# EAGLE board logic (EAGLE 6.4)
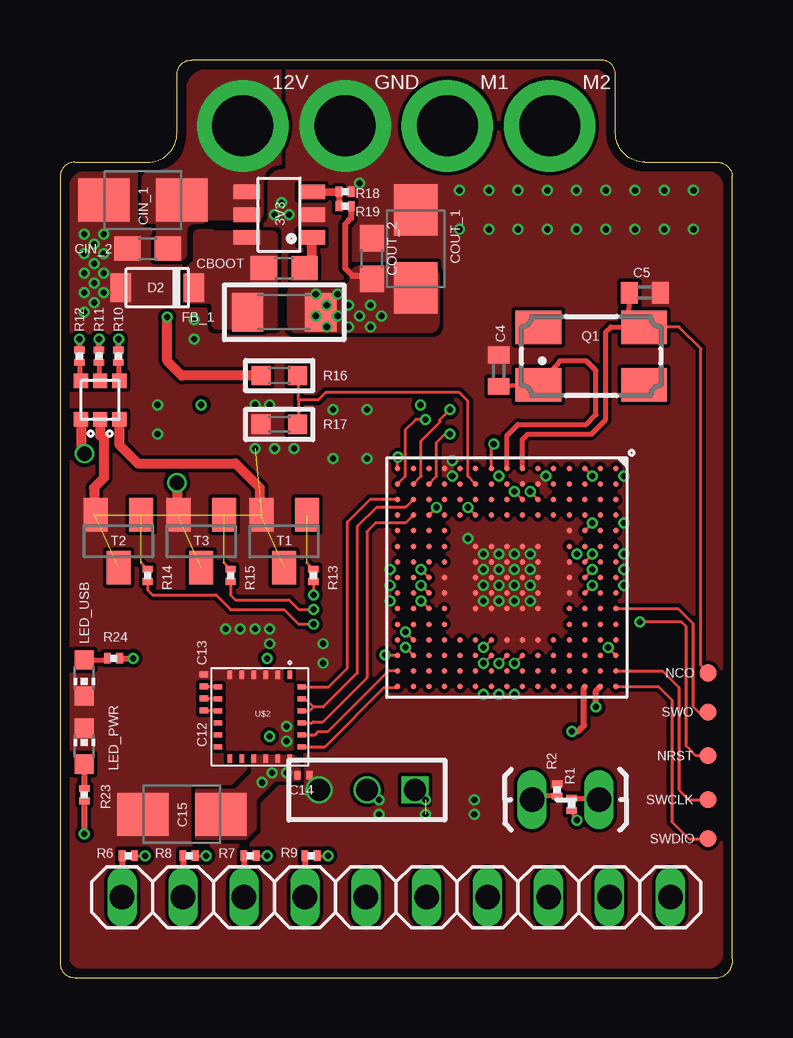
[diagram p0: board, top side]
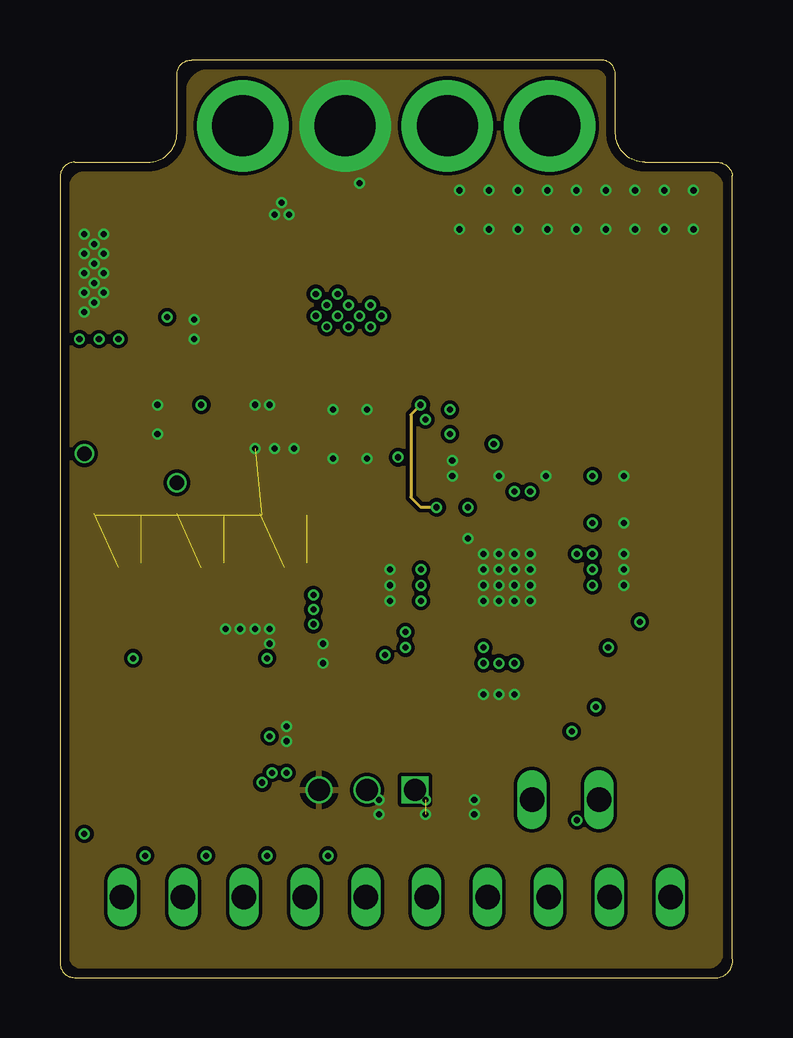
[diagram p1: board, inner layer Route2]
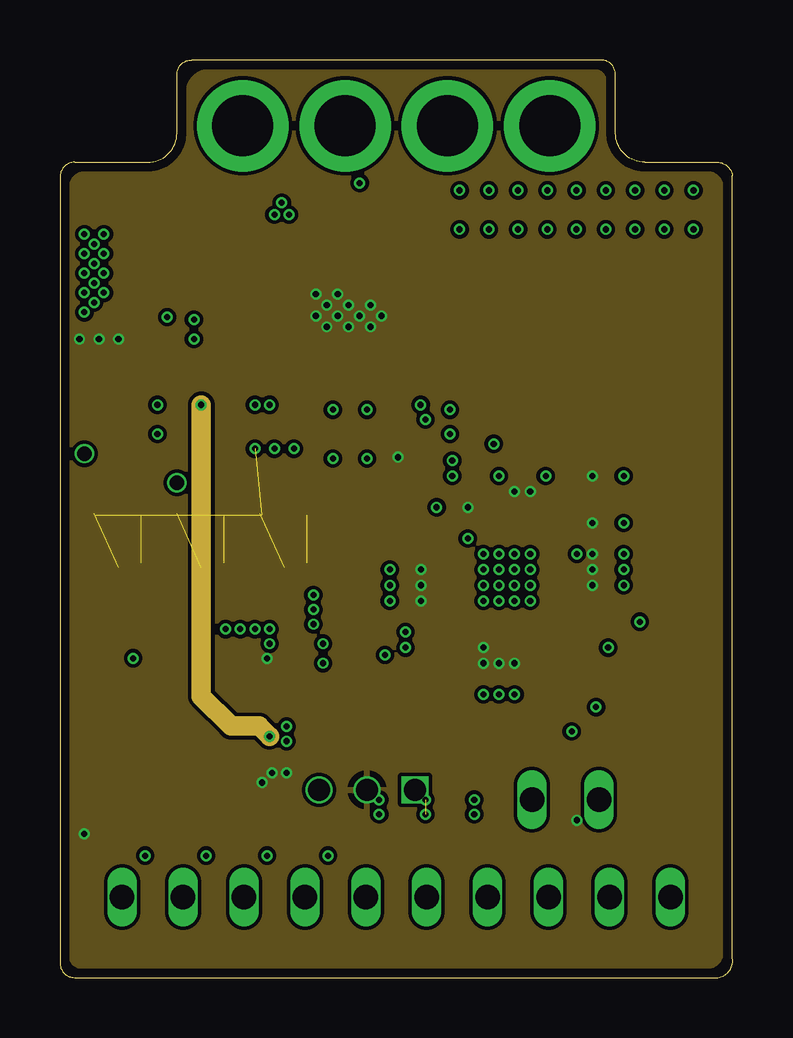
[diagram p2: board, inner layer Route3]
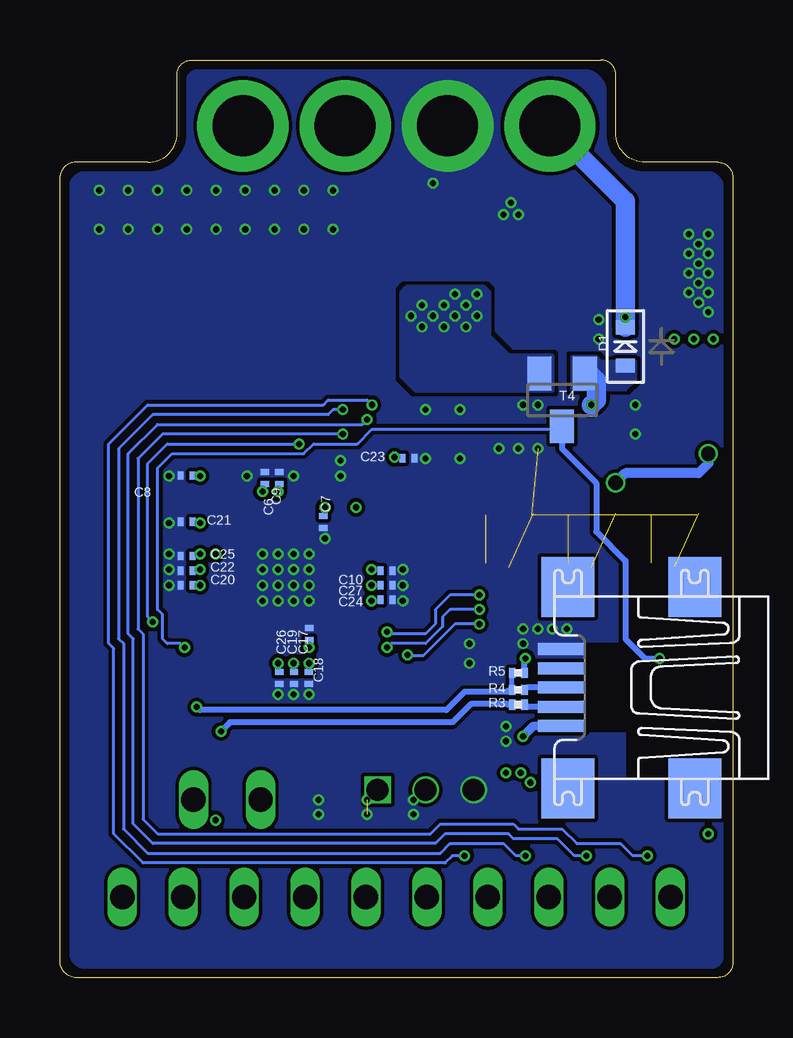
[diagram p3: board, bottom side, seen from below]

Size 28.05 x 38.25 mm. Coordinates in mm from the lower left corner, seen from the top.
Outline: 0.61,0 27.43,0 arc90 28.04,0.81 28.04,33.43 arc90 27.28,33.99 24.38,33.99 arc-90 23.17,35.2 23.17,37.64 arc90 22.56,38.25 5.49,38.25 arc90 4.88,37.64 4.88,35.2 arc-90 3.66,33.99 0.61,33.99 arc90 0,33.38 0,0.61 arc90 0.61,0
Copper layers (1*2*3*16): Top 0.035559375mm / dielectric 0.17018125mm / Route2 0.01778125mm / dielectric 47mil / Route3 0.01778125mm / dielectric 0.17018125mm / Bottom 0.035559375mm
Design rules "LaenPCBOrder *": minimum track width 5mil, minimum drill 10mil, track to track 6mil, track to pad 6mil, pad to pad 6mil, via to via 6mil, smd to smd 6mil, copper to edge 15mil, drill to drill 6mil, minimum pad ring 4mil, minimum via ring 4mil, stop-mask expansion 4mil, vias tented up to drill 13mil, thermal gap 10mil

## Footprints (pad centres in the part's own frame; a part is rotated, then mirrored left to right if it is on the bottom)
R-PDSO-G6 = smd 0.6 x 1.1: 1 -0.95,-1.35; 2 0,-1.35; 3 0.95,-1.35; 4 0.95,1.35; 5 0,1.35; 6 -0.95,1.35
C0402 = smd 0.7 x 0.9: 1 -0.65,0; 2 0.65,0
C0201 = smd 0.25 x 0.35: 1 -0.25,0; 2 0.25,0
B/3528-21W = smd 2.15 x 1.8: + 1.625,0; - -1.625,0
C0603 = smd 1.1 x 1: 1 -0.85,0; 2 0.85,0
SOD-523 = smd 0.8 x 0.6: A 0,-0.8; K 0,0.8
SC-109B = smd 1.2 x 0.85: 1 0,-1.525; 2 0,1.525
L1206 = smd 1.3 x 1.6: 1 -1.524,0; 2 1.524,0
1X02_LOCK_LONGPADS = drill 1.016 long: 1 -0.127,0; 2 2.667,0
1X03M = drill 0.914 square: 1 -2,0 | drill 0.914: 2 0,0; 3 2,0
1X10 = drill 1.016 long: 1 -11.43,0; 2 -8.89,0; 3 -6.35,0; 4 -3.81,0; 5 -1.27,0; 6 1.27,0; 7 3.81,0; 8 6.35,0; 9 8.89,0; 10 11.43,0
RGBLED = smd 0.6 x 0.6: AB 0.8,0.8; AG 0.8,-0.8; AR 0.8,0; CB -0.8,0.8; CG -0.8,-0.8; CR -0.8,0
CHIP-LED0603 = smd 0.8 x 0.8: A 0,-0.75; C 0,0.75
TP07R = smd 0.7 x 0.7: TP 0,0
CTS406 = smd 1.9 x 1.4: 1 -2.2,-1.2; 2 2.2,-1.2; 3 2.2,1.2; 4 -2.2,1.2
R0201 = smd 0.28 x 0.43: 1 -0.255,0; 2 0.255,0
R0603 = smd 0.8 x 0.8: 1 -0.762,0; 2 0.762,0
SOT23-BEC = smd 1 x 1.4: B -0.95,-1.1; C 0,1.1; E 0.95,-1.1
R-PDSO-G14 = smd 0.3 x 1.55: 1 -1.95,-2.3; 2 -1.3,-2.3; 3 -0.65,-2.3; 4 0,-2.3; 5 0.65,-2.3; 6 1.3,-2.3; 7 1.95,-2.3; 8 1.95,2.3; 9 1.3,2.3; 10 0.65,2.3; 11 0,2.3; 12 -0.65,2.3; 13 -1.3,2.3; 14 -1.95,2.3
LGA-24 = smd 0.2 x 0.35: 1 -1.25,-1.75; 2 -0.75,-1.75; 3 -0.25,-1.75; 4 0.25,-1.75; 5 0.75,-1.75; 6 1.25,-1.75; 13 1.25,1.75; 14 0.75,1.75; 15 0.25,1.75; 16 -0.25,1.75; 17 -0.75,1.75; 18 -1.25,1.75 | smd 0.35 x 0.2: 7 1.75,-1.25; 8 1.75,-0.75; 9 1.75,-0.25; 10 1.75,0.25; 11 1.75,0.75; 12 1.75,1.25; 19 -1.75,1.25; 20 -1.75,0.75; 21 -1.75,0.25; 22 -1.75,-0.25; 23 -1.75,-0.75; 24 -1.75,-1.25
UFBGA176+25 = smd 0.23 x 0.23: A1 -4.55,4.55; A2 -3.9,4.55; A3 -3.25,4.55; A4 -2.6,4.55; A5 -1.95,4.55; A6 -1.3,4.55; A7 -0.65,4.55; A8 0,4.55; A9 0.65,4.55; A10 1.3,4.55; A11 1.95,4.55; A12 2.6,4.55; A13 3.25,4.55; A14 3.9,4.55; A15 4.55,4.55; B1 -4.55,3.9; B2 -3.9,3.9; B3 -3.25,3.9; B4 -2.6,3.9; B5 -1.95,3.9; B6 -1.3,3.9; B7 -0.65,3.9; B8 0,3.9; B9 0.65,3.9; B10 1.3,3.9; B11 1.95,3.9; B12 2.6,3.9; B13 3.25,3.9; B14 3.9,3.9; B15 4.55,3.9; C1 -4.55,3.25; C2 -3.9,3.25; C3 -3.25,3.25; C4 -2.6,3.25; C5 -1.95,3.25; C6 -1.3,3.25; C7 -0.65,3.25; C8 0,3.25; C9 0.65,3.25; C10 1.3,3.25; C11 1.95,3.25; C12 2.6,3.25; C13 3.25,3.25; C14 3.9,3.25; C15 4.55,3.25; D1 -4.55,2.6; D2 -3.9,2.6; D3 -3.25,2.6; D4 -2.6,2.6; D5 -1.95,2.6; D6 -1.3,2.6; D7 -0.65,2.6; D8 0,2.6; D9 0.65,2.6; D10 1.3,2.6; D11 1.95,2.6; D12 2.6,2.6; D13 3.25,2.6; D14 3.9,2.6; D15 4.55,2.6; E1 -4.55,1.95; E2 -3.9,1.95; E3 -3.25,1.95; E4 -2.6,1.95; E12 2.6,1.95; E13 3.25,1.95; E14 3.9,1.95; E15 4.55,1.95; F1 -4.55,1.3; F2 -3.9,1.3; F3 -3.25,1.3; F4 -2.6,1.3; F6 -1.3,1.3; F7 -0.65,1.3; F8 0,1.3; F9 0.65,1.3; F10 1.3,1.3; F12 2.6,1.3; F13 3.25,1.3; F14 3.9,1.3; F15 4.55,1.3; G1 -4.55,0.65; G2 -3.9,0.65; G3 -3.25,0.65; G4 -2.6,0.65; G6 -1.3,0.65; G7 -0.65,0.65; G8 0,0.65; G9 0.65,0.65; G10 1.3,0.65; G12 2.6,0.65; G13 3.25,0.65; G14 3.9,0.65; G15 4.55,0.65; H1 -4.55,0; H2 -3.9,0; H3 -3.25,0; H4 -2.6,0; H6 -1.3,0; H7 -0.65,0; H8 0,0; H9 0.65,0; H10 1.3,0; H12 2.6,0; H13 3.25,0; H14 3.9,0; H15 4.55,0; J1 -4.55,-0.65; J2 -3.9,-0.65; J3 -3.25,-0.65; J4 -2.6,-0.65; J6 -1.3,-0.65; J7 -0.65,-0.65; J8 0,-0.65; J9 0.65,-0.65; J10 1.3,-0.65; J12 2.6,-0.65; J13 3.25,-0.65; J14 3.9,-0.65; J15 4.55,-0.65; K1 -4.55,-1.3; K2 -3.9,-1.3; K3 -3.25,-1.3; K4 -2.6,-1.3; K6 -1.3,-1.3; K7 -0.65,-1.3; K8 0,-1.3; K9 0.65,-1.3; K10 1.3,-1.3; K12 2.6,-1.3; K13 3.25,-1.3; K14 3.9,-1.3; K15 4.55,-1.3; L1 -4.55,-1.95; L2 -3.9,-1.95; L3 -3.25,-1.95; L4 -2.6,-1.95; L12 2.6,-1.95; L13 3.25,-1.95; L14 3.9,-1.95; L15 4.55,-1.95; M1 -4.55,-2.6; M2 -3.9,-2.6; M3 -3.25,-2.6; M4 -2.6,-2.6; M5 -1.95,-2.6; M6 -1.3,-2.6; M7 -0.65,-2.6; M8 0,-2.6; M9 0.65,-2.6; M10 1.3,-2.6; M11 1.95,-2.6; M12 2.6,-2.6; M13 3.25,-2.6; M14 3.9,-2.6; M15 4.55,-2.6; N1 -4.55,-3.25; N2 -3.9,-3.25; N3 -3.25,-3.25; N4 -2.6,-3.25; N5 -1.95,-3.25; N6 -1.3,-3.25; N7 -0.65,-3.25; N8 0,-3.25; N9 0.65,-3.25; N10 1.3,-3.25; N11 1.95,-3.25; N12 2.6,-3.25; N13 3.25,-3.25; N14 3.9,-3.25; N15 4.55,-3.25; P1 -4.55,-3.9; P2 -3.9,-3.9; P3 -3.25,-3.9; P4 -2.6,-3.9; P5 -1.95,-3.9; P6 -1.3,-3.9; P7 -0.65,-3.9; P8 0,-3.9; P9 0.65,-3.9; P10 1.3,-3.9; P11 1.95,-3.9; P12 2.6,-3.9; P13 3.25,-3.9; P14 3.9,-3.9; P15 4.55,-3.9; R1 -4.55,-4.55; R2 -3.9,-4.55; R3 -3.25,-4.55; R4 -2.6,-4.55; R5 -1.95,-4.55; R6 -1.3,-4.55; R7 -0.65,-4.55; R8 0,-4.55; R9 0.65,-4.55; R10 1.3,-4.55; R11 1.95,-4.55; R12 2.6,-4.55; R13 3.25,-4.55; R14 3.9,-4.55; R15 4.55,-4.55
UX60A-MB-5ST = smd 2 x 0.5: 1 2.25,1.6; 2 2.25,0.8; 3 2.25,0; 4 2.25,-0.8; 5 2.25,-1.6 | smd 2.2 x 2.5: M1 -3.3,-4.2; M2 -3.3,4.2; M3 2,4.2; M4 2,-4.2

## Placement (x,y rotation side)
3V3  LMR14206  [R-PDSO-G6]  9.14,31.8 90 top
C4  20p  [C0402]  18.29,25.3 90 top
C5  20p  [C0402]  24.38,28.55 0 top
C6  100n  [C0201]  19.51,20.83 90 bottom
C7  100n  [C0201]  17.07,19 270 bottom
C8  100n  [C0201]  22.76,20.93 180 bottom
C9  100n  [C0201]  18.9,20.83 90 bottom
C10  100n  [C0201]  14.43,16.97 0 bottom
C12  .22uF  [C0201]  5.99,11.38 270 top
C13  4.7uF  [C0201]  5.99,12.4 270 top
C14  100nF  [C0201]  10.16,8.43 180 top
C15  10uF  [B/3528-21W]  5.08,6.81 0 top
C17  100n  [C0201]  17.68,12.5 270 bottom
C18  100n  [C0201]  17.65,14.33 90 bottom
C19  100n  [C0201]  18.29,12.5 270 bottom
C20  100n  [C0201]  22.76,16.36 180 bottom
C21  100n  [C0201]  22.76,19 180 bottom
C22  100n  [C0201]  22.76,16.97 180 bottom
C23  100n  [C0201]  13.51,21.64 0 bottom
C24  100n  [C0201]  14.43,15.75 0 bottom
C25  100n  [C0201]  22.76,17.58 180 bottom
C26  100n  [C0201]  18.9,12.5 270 bottom
C27  100n  [C0201]  14.43,16.36 0 bottom
CBOOT  .15uF  [C0603]  9.35,29.57 180 top
CIN_1  10uF  [B/3528-21W]  3.45,32.41 0 top
CIN_2  100nF  [C0603]  3.66,30.38 180 top
COUT_1  47uF  [B/3528-21W]  14.83,30.38 270 top
COUT_2  100nF  [C0603]  13,29.97 90 top
D1  [SOD-523]  4.47,26.31 0 bottom
D2  DB2W60400L  [SC-109B]  4.06,28.75 90 top
FB_1  FB_1206  [L1206]  9.35,27.74 0 top
JP1  M02LOCK_LONGPADS  [1X02_LOCK_LONGPADS]  22.35,7.42 180 top
JP2  [1X03M]  12.8,7.82 180 top
JP3  [1X10]  14.02,3.35 0 top
LED1  LED_RGB3  [RGBLED]  1.68,24.08 90 top
LED_PWR  [CHIP-LED0603]  1.02,9.65 0 top
LED_USB  [CHIP-LED0603]  1.02,12.5 180 top
NCO  TPTP07R  [TP07R]  27.03,12.7 90 top
NRST  TPTP07R  [TP07R]  27.03,9.25 90 top
Q1  [CTS406]  22.15,25.91 0 top
R1  100  [R0201]  21.34,7.21 90 top
R2  10K  [R0201]  20.73,7.82 90 top
R3  22  [R0201]  8.94,11.38 180 bottom
R4  22  [R0201]  8.94,11.99 180 bottom
R5  1.5K  [R0201]  8.94,12.7 0 bottom
R6  22  [R0201]  2.84,5.08 180 top
R7  22  [R0201]  7.92,5.08 180 top
R8  22  [R0201]  5.38,5.08 180 top
R9  22  [R0201]  10.46,5.08 180 top
R10  100  [R0201]  2.44,25.91 270 top
R11  100  [R0201]  1.63,25.91 270 top
R12  100  [R0201]  0.81,25.91 270 top
R13  100  [R0201]  10.57,16.76 270 top
R14  100  [R0201]  3.66,16.76 270 top
R15  100  [R0201]  7.11,16.76 270 top
R16  [R0603]  9.14,25.1 180 top
R17  [R0603]  9.14,23.06 0 top
R18  1.02K  [R0201]  11.89,32.77 180 top
R19  3.4K  [R0201]  11.89,32.16 180 top
R23  330  [R0201]  1.02,7.62 270 top
R24  330  [R0201]  2.24,13.31 180 top
SWCLK  TPTP07R  [TP07R]  27.03,7.42 90 top
SWDIO  TPTP07R  [TP07R]  27.03,5.79 90 top
SWO  TPTP07R  [TP07R]  27.03,11.07 90 top
T1  [SOT23-BEC]  9.35,18.19 180 top
T2  [SOT23-BEC]  2.44,18.19 180 top
T3  [SOT23-BEC]  5.89,18.19 180 top
T4  [SOT23-BEC]  7.11,24.08 180 bottom
U1  [R-PDSO-G14]  -9.55,12.29 270 top  (outside the outline)
U$2  LSM9DS0  [LGA-24]  8.33,10.87 180 top
U$6  STM32F407IG  [UFBGA176+25]  18.63,16.68 270 top
X1  MINI-USB-UX60A-MB-5ST  [UX60A-MB-5ST]  4.88,12.09 180 bottom

## Library data of the parts
3V3 = ti_lmr14206
C4-C10 C12-C15 C17-C27 CBOOT CIN_1 CIN_2 COUT_1 COUT_2 R1-R15 R18 R19 R23 R24 = rcl
D1 LED_PWR LED_USB = adafruit
D2 = diode-1
FB_1 R16 R17 = rc-master-smd
JP1 = SparkFun-Connectors
JP2 JP3 = pinhead-1
LED1 = dp_devices
NCO NRST SWCLK SWDIO SWO = testpad
Q1 = crystal; OC_FARNELL: unknown; OC_NEWARK: unknown
T1-T4 = transistor
U1 = common
U$2 = st_lsm9ds0_temp_sense
U$6 = stm32_32bit_mcu
X1 = con-hirose; OC_FARNELL: unknown; OC_NEWARK: unknown

## Nets
3V3: 3V3.6 CBOOT.2 D2.1 FB_1.1
+12V: 3V3.4 3V3.5 CIN_1.+ CIN_2.1 D1.K R16.2
GND: 3V3.2 C4.2 C5.2 C6.2 C7.2 C8.2 C9.2 C10.2 C13.1 C14.1 C15.- C17.2 C18.2 C19.2 C20.2 C21.2 C22.2 C23.2 C24.2 C25.2 C26.2 C27.2 CIN_1.- CIN_2.2 COUT_1.- COUT_2.2 D2.2 JP2.3 LED_PWR.C LED_USB.C R2.2 R17.1 R18.1 T1.E T2.E T3.E U$2.2 U$2.3 U$2.4 U$2.5 U$2.6 U$6.D5 U$6.D7 U$6.D8 U$6.D9 U$6.F2 U$6.F6 U$6.F7 U$6.F8 U$6.F9 U$6.F10 U$6.F12 U$6.G2 U$6.G6 U$6.G7 U$6.G8 U$6.G9 U$6.G10 U$6.G12 U$6.H6 U$6.H7 U$6.H8 U$6.H9 U$6.H10 U$6.H12 U$6.J6 U$6.J7 U$6.J8 U$6.J9 U$6.J10 U$6.K6 U$6.K7 U$6.K8 U$6.K9 U$6.K10 U$6.M1 U$6.M8 U$6.M9 X1.5
HIN1: JP3.1 R6.2
HIN2: JP3.3 R7.2
I2C1_SCL: U$6.B6
I2C1_SDA: U$6.B5
LED_BLUE: R15.2 U$6.P13
LED_GREEN: R13.2 U$6.P12
LED_RED: R14.2 U$6.R13
LIN1: JP3.2 R8.2
LIN2: JP3.4 R9.2
LIPO_ADC_SIG: R16.1 R17.2 U$6.K2
N$1: JP1.1 R1.2
N$2: R13.1 T1.B
N$3: R14.1 T2.B
N$4: R15.1 T3.B
N$6: LED1.AR R11.2
N$7: LED1.CR T2.C
N$9: 3V3.1 CBOOT.1
N$16: JP1.2 R2.1
N$18: R3.1 X1.2
N$20: 3V3.3 R18.2 R19.2
N$22: R4.1 X1.3
N$25: C13.2 U$2.7
N$28: C12.1 U$2.8
N$29: LED1.CG T1.C
N$30: LED1.AG R10.2
N$31: LED1.CB T3.C
N$32: LED1.AB R12.2
N$33: C12.2 U$2.9
N$34: U$2.10
N$35: U$2.11
N$36: U$2.12
N$39: LED_PWR.A R23.1
N$40: LED_USB.A R24.2
N$42: JP3.5
N$43: JP3.6
N$44: JP3.7
N$45: JP3.8
N$46: JP3.9
N$47: JP3.10
NRST: NRST.TP U$6.J1
OSC_IN: C5.1 NCO.TP Q1.3 U$6.G1
OSC_OUT: C4.1 Q1.1 U$6.H1
PA3: R8.1 U$6.R2
PA4: R9.1 U$6.N4
PB14: U$2.20 U$6.R14
PB15: U$2.19 U$6.R15
PWM_1: R6.1 U$6.N2
PWM_2: R7.1 U$6.P2
REC_SIG: JP2.1
SPI1_MISO: U$2.22 U$2.23 U$6.P3
SPI1_MOSI: U$2.24 U$6.R3
SPI1_SCK: U$2.21 U$6.P4
SWCLK: SWCLK.TP U$6.A14
SWDIO: SWDIO.TP U$6.A15
SWO: SWO.TP U$6.A10
USB_DETECT: R24.1 T4.C U$6.A13
USB_DETECT_TRANS: D1.A T4.B X1.1
USB_DM: R3.2 U$6.C15
USB_DP: R4.2 R5.1 U$6.B15
USB_ID: U$6.D15
USB_VBUS: U$6.E15
VDD: C6.1 C7.1 C8.1 C9.1 C10.1 C14.2 C15.+ C17.1 C18.1 C19.1 C20.1 C21.1 C22.1 C23.1 C24.1 C25.1 C26.1 C27.1 COUT_1.+ COUT_2.1 FB_1.2 JP2.2 R1.1 R5.2 R10.1 R11.1 R12.1 R19.1 R23.2 T4.E U$2.15 U$2.16 U$2.17 U$2.18 U$6.C1 U$6.C5 U$6.C7 U$6.C8 U$6.C9 U$6.F3 U$6.G3 U$6.G13 U$6.H13 U$6.J12 U$6.J13 U$6.K4 U$6.N8 U$6.N9 U$6.N10 U$6.R1

## Tracks (layer width: path | path; a pad name or v marks a point on that pad's centre or on a via)
3V3
  pour Top (rank 5, no thermals): 8.84,31.04 6.4,31.04 arc90 6.25,31.09 5.79,31.09 arc90 5.64,30.94 5.64,29.87 arc-90 5.49,29.72 arc-90 5.33,29.57 5.33,28.35 arc90 5.49,28.19 6.25,28.19 arc-90 6.4,28.04 6.4,27.28 arc90 6.55,27.13 8.84,27.13 arc90 8.99,27.28 8.99,30.89 arc90
+12V  (via drill 0.25 pad 0.36, 2.54 pad 3.81)
  Top 0.406: R16.2 5.08,25.1 4.47,25.7 v4.47,27.53
  Bottom 0.813: D1.K v4.47,27.53 4.47,32.36 v7.62,35.51
  pour Top (rank 5, no thermals): 9.14,37.8 6.25,37.8 arc90 5.33,36.88 5.33,34.9 arc-90 3.96,33.53 3.81,33.53 arc90 3.51,33.22 3.51,31.85 arc90 3.81,31.55 3.96,31.55 arc-90 4.11,31.39 4.11,30.18 arc90 4.27,30.02 5.03,30.02 arc90 5.18,30.18 5.18,31.09 arc-90 5.64,31.55 5.94,31.55 arc-90 6.25,31.7 8.08,31.7 arc90 8.38,31.85 8.38,33.22 arc-90 9.14,33.99
GND  (via drill 0.25 pad 0.36, 2.54 pad 3.81)  (4 unrouted)
  Top 0.127: U$6.G2 | U$6.F2
  other vias: 11.89,35.51 17.66,17 18.31,17 18.95,17 19.61,17 19.61,16.35 18.95,16.35 18.31,16.35 17.66,16.35 17.66,15.7 18.31,15.7 18.95,15.7 19.61,15.7 17.66,16.35 17.66,17.65 18.31,17.65 19.61,17.65 18.95,16.35 18.95,17.65 12.8,21.64 23.5,18.95 23.5,20.9 23.5,17.65 23.5,17 23.5,16.35 18.95,11.8 18.31,11.8 17.66,11.8 13.76,16.35 13.76,15.7 13.76,17 17.01,18.3 16.36,20.9 16.36,21.55 20.25,20.9 18.31,20.9 6.91,14.53 7.52,14.53 8.13,14.53 8.74,14.53 8.74,13.92 10.97,13.92 10.97,13.11 9.45,10.46 9.45,9.86 13.31,6.81 15.24,6.81 13.31,7.42 15.24,7.42 17.27,7.42 17.27,6.81 11.38,23.67 12.8,23.67 8.13,22.05 8.94,22.05 9.75,22.05 11.38,21.64 4.06,23.88 4.06,22.66 1.02,30.99 1.02,30.18 1.02,29.36 1.02,28.55 1.02,27.74 1.42,28.14 1.42,28.96 1.42,29.77 1.42,30.58 1.83,30.18 1.83,29.36 1.83,28.55 1.83,30.99 9.25,32.31 8.94,31.8 9.55,31.8 12.5,33.12 5.59,27.43 5.59,26.62 8.13,23.88 8.74,23.88 16.66,32.82 17.88,32.82 19.1,32.82 20.32,32.82 21.54,32.82 22.76,32.82 23.98,32.82 25.2,32.82 26.42,32.82 16.66,31.19 17.88,31.19 19.1,31.19 20.32,31.19 21.54,31.19 22.76,31.19 23.98,31.19 25.2,31.19 26.42,31.19
  pour Top (rank 6, no thermals): 22.25,37.8 6.25,37.8 arc90 5.33,36.88 5.33,35.36 arc-90 3.51,33.53 1.07,33.53 arc90 0.46,32.92 0.46,0.91 arc90 0.91,0.46 26.97,0.46 arc90 27.58,1.07 27.58,32.92 arc90 26.97,33.53 24.38,33.53 arc-90 22.71,35.2 22.71,37.34 arc90
  pour Bottom (rank 6, no thermals): 22.25,37.8 6.25,37.8 arc90 5.33,36.88 5.33,35.36 arc-90 3.51,33.53 1.07,33.53 arc90 0.46,32.92 0.46,0.91 arc90 0.91,0.46 26.97,0.46 arc90 27.58,1.07 27.58,32.92 arc90 26.97,33.53 24.38,33.53 arc-90 22.71,35.2 22.71,37.34 arc90
  pour Route2 (rank 5): 22.25,37.8 6.25,37.8 arc90 5.33,36.88 5.33,35.36 arc-90 3.51,33.53 1.07,33.53 arc90 0.46,32.92 0.46,0.91 arc90 0.91,0.46 26.97,0.46 arc90 27.58,1.07 27.58,32.92 arc90 26.97,33.53 24.38,33.53 arc-90 22.71,35.2 22.71,37.34 arc90
HIN1
  Top 0.254: R6.2 JP3.1
HIN2
  Top 0.254: R7.2 JP3.3
LED_BLUE  (via drill 0.25 pad 0.36)
  Top 0.127: U$6.P13 | U$6.P13 v14.41,13.75 | R15.2 7.11,15.95 7.31,15.75 9.55,15.75 9.96,15.34 v10.57,15.34
  Bottom 0.127: v10.57,15.34 11.79,15.34 12.09,15.04 12.09,14.63 12.8,13.92 14.24,13.92 v14.41,13.75
LED_GREEN  (via drill 0.25 pad 0.36)
  Top 0.127: U$6.P12 | U$6.P12 v14.41,14.4 | R13.2 v10.57,15.95
  Bottom 0.127: v10.57,15.95 11.79,15.95 12.4,15.34 12.4,14.73 12.8,14.33 14.33,14.33 v14.41,14.4
LED_RED  (via drill 0.25 pad 0.36)
  Top 0.127: U$6.R13 | R14.2 3.66,16.15 3.86,15.95 6.5,15.95 7.11,15.34 9.35,15.34 9.96,14.73 v10.57,14.73 | v13.55,13.45 14.06,13.45 U$6.R13
  Bottom 0.127: v10.57,14.73 11.58,14.73 12.9,13.41 13.51,13.41 v13.55,13.45
LIN1
  Top 0.254: R8.2 JP3.2
LIN2
  Top 0.254: R9.2 JP3.4
LIPO_ADC_SIG
  Top 0.127: U$6.K2 | U$6.K2 17.01,20.9 17.01,24.04 16.66,24.38 11.07,24.38 10.77,24.08 9.96,24.08 | 9.96,24.08 9.96,25.04 R16.1 | 9.96,24.08 9.96,23.11 R17.2
N$1
  Top 0.203: R1.2 22.43,7.47 JP1.1
N$2  (1 unrouted)
  Top 0.127: 10.3,17.29 R13.1
N$3  (1 unrouted)
  Top 0.127: 3.39,17.29 R14.1
N$4  (1 unrouted)
  Top 0.127: 6.84,17.29 R15.1
N$6
  Top 0.127: 1.63,24.93 LED1.AR
  Top 0.203: R11.2 1.63,24.93
N$7  (1 unrouted)
  Top 0.406: 1.42,19.35 1.42,20.42 1.83,20.83 1.83,22.45 1.68,22.61 LED1.CR
N$9
  Top 0.406: 3V3.1 10.49,29.86 CBOOT.1
N$16
  Top 0.203: R2.1 19.84,7.57 JP1.2
N$18
  Bottom 0.254: X1.2 8.6,11.29 R3.1
N$20
  Top 0.254: R18.2 R19.2
  Top 0.305: 3V3.3 11.62,32.75 R18.2
N$22
  Bottom 0.254: X1.3 8.58,12.09 R4.1
N$24  (via drill 2.54 pad 3.81)
  other vias: 20.42,35.51
N$25
  Top 0.127: U$2.7 6.02,12.12 C13.2
N$27  (via drill 2.54 pad 3.81)
  other vias: 16.15,35.51
N$28
  Top 0.127: U$2.8 6,11.62 C12.1
N$29  (1 unrouted)
  Top 0.406: 8.33,19.35 8.33,20.42 7.31,21.44 3.25,21.44 2.48,22.21 LED1.CG
N$30
  Top 0.127: 2.44,24.92 LED1.AG
  Top 0.203: R10.2 2.44,24.92
N$31  (via drill 0.6)  (1 unrouted)
  Top 0.406: LED1.CB 0.88,21.98 v1.02,21.84 | v4.88,20.62 4.88,19.35
  Bottom 0.406: v1.02,21.84 1.02,21.44 1.42,21.03 4.47,21.03 v4.88,20.62
N$32
  Top 0.203: R12.2 0.81,24.94 LED1.AB
N$33
  Top 0.127: U$2.9 6,11.12 C12.2
N$39
  Top 0.254: LED_PWR.A R23.1
N$40
  Top 0.203: LED_USB.A 2.02,13.25 R24.2
N$61  (via drill 0.25 pad 0.36)
  other vias: 21.56,17.65
NRST  (via drill 0.25 pad 0.36)
  Top 0.127: NRST.TP 26.52,9.25 26.11,9.65 26.11,14.63 25.91,14.83 v24.18,14.83 | U$6.J1 17.98,22.15 v18.09,22.25
  Bottom 0.127: v24.18,14.83 24.38,15.04 24.38,21.44 23.57,22.25 v18.09,22.25
OSC_IN
  Top 0.127: Q1.3 24.37,27.13 25.81,27.13 26.72,26.21 26.72,13 NCO.TP
  Top 0.203: U$6.G1 19.28,22.43 19.51,22.66 22.15,22.66 22.76,23.27 22.76,26.92 22.96,27.13 24.26,27.13 Q1.3 23.7,27.69 C5.1
OSC_OUT
  Top 0.203: U$6.H1 18.63,21.88 18.63,22.59 19.1,23.06 21.95,23.06 22.35,23.47 22.35,25.3 21.95,25.7 20.84,25.7 Q1.1 19.85,24.71 C4.1
PA3  (via drill 0.25 pad 0.36)
  Top 0.127: R8.1 v6.1,5.08 | U$6.R2 | U$6.R2 14.41,20.9 14.41,22.84 14.83,23.27 v15.24,23.27
  Bottom 0.127: v6.1,5.08 6.6,5.08 7.31,5.79 9.14,5.79 9.35,5.99 11.99,5.99 12.4,5.59 24.18,5.59 24.99,6.4 24.99,14.12 25.2,14.33 25.2,21.84 23.98,23.06 15.44,23.06 v15.24,23.27
PA4  (via drill 0.25 pad 0.36)
  Top 0.127: U$6.N4 | U$6.N4 v15.7,19.6 | R9.1 v11.18,5.08
  Route2 0.127: v15.04,23.88 14.63,23.47 14.63,20.02 15.04,19.61 v15.7,19.61 v15.7,19.6
  Bottom 0.127: v15.7,19.61 v15.7,19.6 | v11.18,5.08 11.68,5.08 11.99,4.78 24.59,4.78 25.81,5.99 25.81,13.72 26.01,13.92 26.01,22.25 24.38,23.88 17.07,23.88 16.87,24.08 15.24,24.08 v15.04,23.88
PB14
  Top 0.127: 14.06,12.8 U$6.R14 13.69,12.78 11.18,10.26 10.77,10.26 10.63,10.12 U$2.20
PB15
  Top 0.127: U$2.19 11.04,9.62 13.51,12.09 14.04,12.09 U$6.R15
PWM_1  (via drill 0.25 pad 0.36)
  Top 0.127: R6.1 v3.56,5.08 | U$6.N2 | U$6.N2 15.7,20.9 15.7,22.31 16.05,22.66 v16.26,22.66
  Bottom 0.127: v3.56,5.08 4.17,5.08 4.67,5.59 6.5,5.59 7.11,6.2 8.94,6.2 9.14,6.4 12.19,6.4 12.6,5.99 23.98,5.99 24.59,6.6 24.59,14.33 24.79,14.53 24.79,21.64 23.77,22.66 v16.26,22.66
PWM_2  (via drill 0.25 pad 0.36)
  Top 0.127: R7.1 v8.64,5.08 | U$6.P2 | U$6.P2 15.05,20.9 15.05,22.37 15.85,23.16 15.85,23.27 v16.26,23.67 16.05,23.47
  Bottom 0.127: v16.26,23.67 16.66,23.67 16.87,23.47 24.18,23.47 25.6,22.05 25.6,14.12 25.4,13.92 25.4,6.2 24.38,5.18 12.19,5.18 11.79,5.59 9.55,5.59 9.04,5.08 v8.64,5.08
SPI1_MISO
  Top 0.127: U$6.P3 | U$6.P3 14.41,19.6 13.2,19.6 12.4,18.8 12.4,12.7 10.97,11.28 10.57,11.28 | U$2.22 10.41,11.12 10.57,11.28 | U$2.23 10.22,11.62 10.57,11.28
SPI1_MOSI
  Top 0.127: U$6.R3 12.92,19.93 11.99,19 11.99,12.9 11.21,12.12 U$2.24
SPI1_SCK
  Top 0.127: U$6.P4 | U$6.P4 14.41,18.95 13.16,18.95 12.8,18.59 12.8,12.5 10.97,10.67 10.57,10.67 10.52,10.62 U$2.21
SWCLK
  Top 0.127: U$6.A14 25.12,12.78 25.81,12.09 25.81,7.82 26.21,7.42 SWCLK.TP
SWDIO
  Top 0.127: U$6.A15 24.95,12.13 25.5,11.58 25.5,6.5 26.21,5.79 SWDIO.TP
SWO
  Top 0.127: SWO.TP 26.72,10.97 26.42,11.28 26.42,14.73 25.77,15.38 U$6.A10
USB_DETECT  (via drill 0.25 pad 0.36)
  Top 0.127: U$6.A13 | U$6.A13 v22.86,13.75
  Top 0.254: R24.1 v3.05,13.31
  Bottom 0.127: v22.86,13.75 23.02,13.92 23.57,13.92 23.77,14.12 23.77,15.14 23.98,15.34 23.98,21.23 23.37,21.84 17.88,21.84 17.48,22.25 15.65,22.25 15.04,22.86 7.23,22.86 T4.C
  Bottom 0.254: T4.C 7.11,22.05 5.69,20.62 5.69,18.59 4.47,17.37 4.47,14.12 3.66,13.31 v3.05,13.31
USB_DETECT_TRANS  (via drill 0.25 pad 0.36)
  Route3 0.813: v5.89,23.88 5.89,11.72 X1.1 8.31,10.49 v8.74,10.06
  Bottom 0.356: X1.1 8.31,10.49 v8.74,10.06
  Bottom 0.813: T4.B 5.98,25.18 5.69,24.89 5.69,24.08 v5.89,23.88
  pour Bottom (rank 5, no thermals): 6.71,25.91 5.69,25.91 5.49,25.7 4.06,25.7 4.06,24.89 4.47,24.49 6.71,24.49
USB_DM  (via drill 0.25 pad 0.36)
  Top 0.254: v21.34,10.26 21.59,10.26 21.84,10.52 21.84,12.09 U$6.C15
  Bottom 0.254: R3.2 9.37,11.38 9.4,11.4 10.92,11.4 11.68,10.64 20.95,10.64 v21.34,10.26
USB_DP  (via drill 0.25 pad 0.36)
  Top 0.254: v22.35,11.28 22.35,11.95 U$6.B15
  Bottom 0.203: R4.2 R5.1
  Bottom 0.254: R4.2 9.32,11.99 9.4,11.91 11.18,11.91 11.94,11.15 22.22,11.15 v22.35,11.28
VDD  (via drill 0.25 pad 0.36)
  Top 0.127: U$6.N10 | U$6.N10 v15.05,15.7 | U$6.N9 | U$6.N9 v15.05,16.35 | U$6.N8 | U$6.N8 v15.05,17 | v17.01,19.6 | v17.01,19.6 U$6.K4 | U$6.G3 | U$6.G3 v18.95,20.25 | U$6.F3 | U$6.F3 v19.61,20.25 | U$6.C5 | U$6.C5 v22.2,18.95 | U$6.C7 | U$6.C7 v22.2,17.65 | U$6.C8 | U$6.C8 v22.2,17 | U$6.C9 | U$6.C9 v22.2,16.35 | U$6.G13 | U$6.G13 v18.95,13.1 | U$6.H13 | U$6.H13 v18.31,13.1 | U$6.J13 | U$6.J13 v17.66,13.1 | U$6.J12 | U$6.J12 v17.66,13.75 | R1.1 21.4,6.72 v21.56,6.56 | U$6.R1 14.08,21.67 v14.1,21.69 | U$6.C1 | U$6.C1 v22.2,20.9
  Top 0.254: R19.1 12.14,31.65 11.89,31.39 11.89,29.57 12.19,29.26 12.87,29.26 COUT_2.1 | R12.1 v0.81,26.62 | R11.1 v1.63,26.62 | R10.1 v2.44,26.62 | R23.2 v1.02,5.99
  Bottom 0.127: v22.21,16.35 v22.2,16.35 v22.21,16.36 C20.1 | 22.53,18.95 C21.1 22.25,19 v22.2,18.95 | v17.01,19.6 17.01,19.24 C7.1 | v15.05,16.35 14.81,16.35 C27.1 | v15.05,15.7 14.77,15.7 C24.1 | v17.66,13.75 17.66,14 C18.1 | 18.96,20.26 v18.95,20.25 18.9,20.31 C9.1 | C23.1 14.08,21.7 v14.1,21.69 | C22.1 22.24,16.97 v22.2,17 | C25.1 22.28,17.58 v22.2,17.65 | C6.1 19.51,20.35 v19.61,20.25 | C10.1 15.02,16.97 v15.05,17 | C17.1 17.68,13.08 v17.66,13.1 | C19.1 18.29,13.09 v18.31,13.1 | C26.1 18.9,13.05 v18.95,13.1 | C8.1 22.23,20.93 v22.2,20.9
  Bottom 0.254: R5.2 8.69,13.26 v8.64,13.31
  other vias: 10.67,28.5 11.58,28.5 11.13,28.04 12.04,28.04 11.58,27.58 10.67,27.58 11.13,27.13 12.04,27.13 12.5,27.58 12.95,27.13 13.41,27.58 12.95,28.04 8.84,8.53 8.43,8.13 9.45,8.53
  pour Route3 (rank 5): 22.25,37.8 6.25,37.8 arc90 5.33,36.88 5.33,35.36 arc-90 3.51,33.53 1.07,33.53 arc90 0.46,32.92 0.46,0.91 arc90 0.91,0.46 26.97,0.46 arc90 27.58,1.07 27.58,32.92 arc90 26.97,33.53 24.38,33.53 arc-90 22.71,35.2 22.71,37.34 arc90
  pour Top (rank 5, no thermals): 10.21,28.8 11.89,28.8 arc90 12.19,29.11 12.19,29.26 arc-90 12.5,29.57 15.39,29.57 arc-90 15.7,29.26 15.7,27.28 arc-90 15.39,26.97 9.91,26.97 arc-90 9.6,27.28 9.6,28.5 arc-90 9.91,28.8
  pour Bottom (rank 5, no thermals): 7.52,25.91 9.35,25.91 10.16,26.72 10.16,28.55 10.36,28.75 13.61,28.75 13.82,28.55 13.82,25.1 13.21,24.49 7.52,24.49
  pour Top (rank 5, no thermals): 8.03,9.25 9.75,9.25 9.96,9.04 9.96,8.23 8.94,8.23 8.13,7.42 8.13,6.2 7.72,5.79 5.69,5.79 5.69,7.82 7.32,7.82 8.03,8.53

## Text on the board
tPlace: 12V | GND | M1 | M2
Document: Layer Info | TOP: GND | RT2 : GND | RT3: +12V | BTM: GND